# Altium PCB Positive_PCB.PcbDoc
Units mm, origin at the board's own origin, x right, y up, seen from the top; angles counter-clockwise.
Board outline 260 x 33 mm, 4 copper layers (Top Layer 1, Top Layer 2, Bottom Layer 2, Bottom Layer 1), stack 0.603 mm thick; 32 components, 34 nets, 85 pads, 24 vias.
Unrouted connection lines stored in the file: 5.
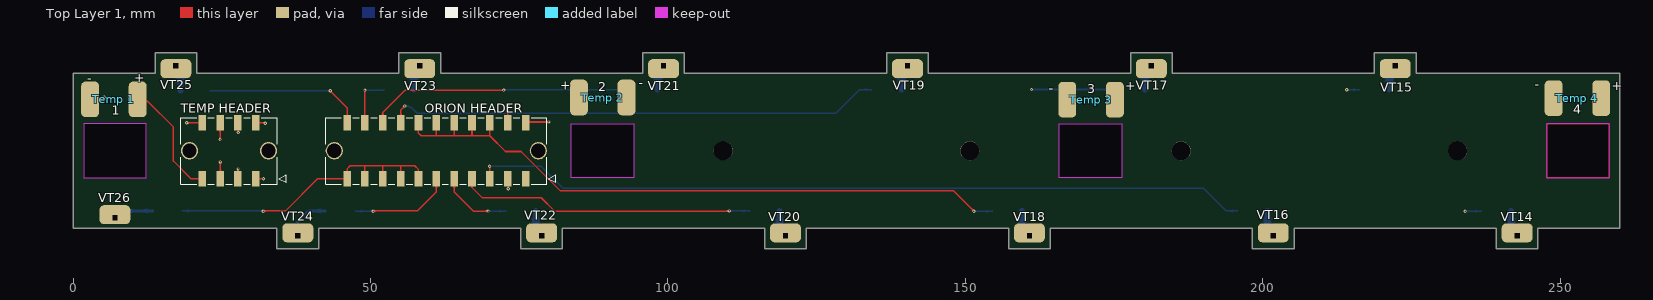
[diagram p0: Top Layer 1 view]
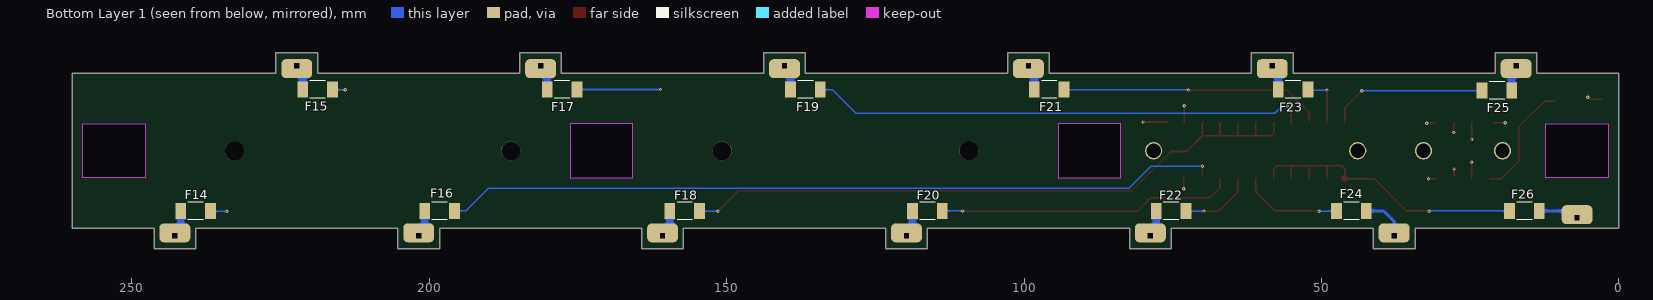
[diagram p1: Bottom Layer 1 view, seen from below]
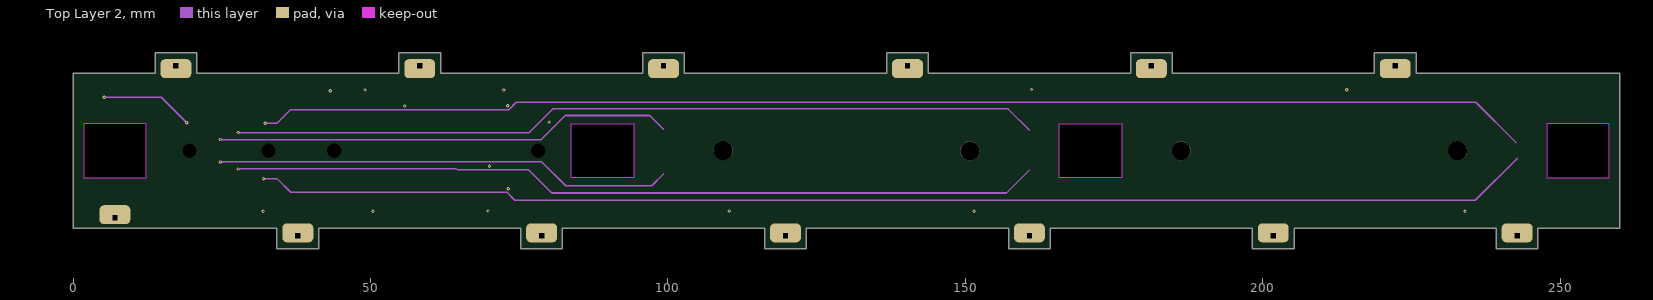
[diagram p2: Top Layer 2]
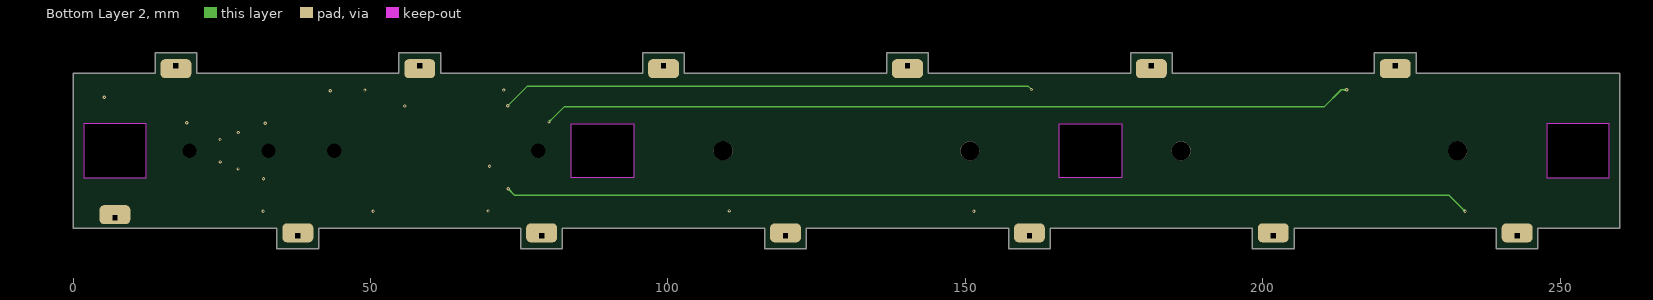
[diagram p3: Bottom Layer 2]
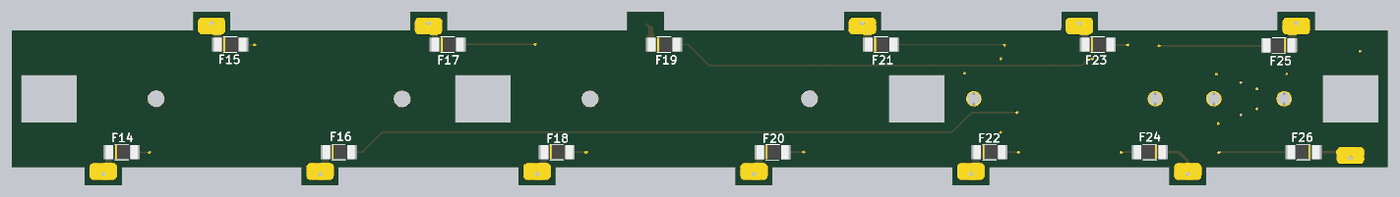
[diagram p4: 3D render of the assembled board from below, using the file's embedded part models]

## Layer stack, top to bottom
Top Solder: solder mask 0.0102, Solder Resist, Dk 3.5
Top Layer 1: signal copper 0.035
Dielectric 2: prepreg 0.0711, PP-006, Dk 4.1
Top Layer 2: signal copper 0.0356
Dielectric 1: dielectric 0.32, FR-4, Dk 4.8
Bottom Layer 2: signal copper 0.0356
Dielectric 3: prepreg 0.0711, PP-006, Dk 4.1
Bottom Layer 1: signal copper 0.035
Bottom Solder: solder mask 0.0102, Solder Resist, Dk 3.5

## Board outline
34.263,9.893 34.263,13.393 0.013,13.393 0.013,39.393 13.763,39.393 13.763,42.893 20.763,42.893 20.763,39.393 54.763,39.393 54.763,42.893 61.763,42.893 61.763,39.393 95.763,39.393 95.763,42.893 102.763,42.893 102.763,39.393 136.763,39.393 136.763,42.893 143.763,42.893 143.763,39.393 177.763,39.393 177.763,42.893 184.763,42.893 184.763,39.393 218.763,39.393 218.763,42.893 225.763,42.893 225.763,39.393 260.013,39.393 260.013,13.393 246.263,13.393 246.263,9.893 239.263,9.893 239.263,13.393 205.263,13.393 205.263,9.893 198.263,9.893 198.263,13.393 164.263,13.393 164.263,9.893 157.263,9.893 157.263,13.393 123.263,13.393 123.263,9.893 116.263,9.893 116.263,13.393 82.263,13.393 82.263,9.893 75.263,9.893 75.263,13.393 41.263,13.393 41.263,9.893
cut-out: 83.763,30.893 94.263,30.893 94.263,21.893 83.763,21.893
cut-out: 1.763,30.893 1.763,21.893 12.263,21.893 12.263,30.893
cut-out: 165.763,30.893 176.263,30.893 176.263,21.893 165.763,21.893
cut-out: 247.763,30.893 247.763,21.893 258.263,21.893 258.263,30.893

## Design rules (kind name [scope] priority, off if disabled: settings)
Clearance [All] p1: gap=0.2 ignorepadtopadclearanceinfootprint=FALSE
PolygonConnect [All] p1: connectstyle=Relief reliefconductorwidth=0.254 reliefentries=4 polygonreliefangle="90 Angle" airgapwidth=0.254
RoutingVias [All] p1: holewidth=0.711 width=1.27 viastyle="Through Hole" minholewidth=0.711 minwidth=1.27 maxholewidth=0.711 maxwidth=1.27
SolderMaskExpansion [All] p1: expansion=0.102 istentingtop=FALSE
Width [All] p1: maxlimit=2 minlimit=0.257 preferedwidth=0.257 minimp=50.000000 maximp=50.000000 favimp=50.000000
29 further rules are at their usual default settings.

## Components (designator, comment, footprint, x,y, rotation, side; value= is the part's Value field where it differs from the comment)
F14 "0154.750MRL" 0451Series_LTF 239.263,16.27 r180 bottom
F15 "0154.750MRL" 0451Series_LTF 218.763,36.67 r180 bottom
F16 "0154.750MRL" 0451Series_LTF 198.263,16.27 r180 bottom
F17 "0154.750MRL" 0451Series_LTF 177.668,36.67 r180 bottom
F18 "0154.750MRL" 0451Series_LTF 157.042,16.27 r180 bottom
F19 "0154.750MRL" 0451Series_LTF 136.763,36.67 r180 bottom
F20 "0154.750MRL" 0451Series_LTF 116.25,16.25 r180 bottom
F21 "0154.750MRL" 0451Series_LTF 95.763,36.67 r180 bottom
F22 "0154.750MRL" 0451Series_LTF 75.263,16.27 r180 bottom
F23 "0154.750MRL" 0451Series_LTF 54.763,36.67 r180 bottom
F24 "0154.750MRL" 0451Series_LTF 44.95,16.27 r0 bottom
F25 "0154.750MRL" 0451Series_LTF 20.51,36.5 r0 bottom
F26 "0154.750MRL" 0451Series_LTF 15.878,16.27 r0 bottom
"ORION HEADER" "430452215" CON_430452215_MOL 61.052,26.393 r0 top
"Temp 1" "Temp_Pins" TEMP_PINS 6.84,35.04 r180 top
"Temp 2" "Temp_Pins" TEMP_PINS 89.02,35.34 r0 top
"Temp 3" "Temp_Pins" TEMP_PINS 171.13,34.98 r180 top
"Temp 4" "Temp_Pins" TEMP_PINS 252.89,35.23 r180 top
"TEMP HEADER" "430450815" CON_430450815_MOL 26.2,26.393 r0 top
VT14 "Voltage_Tap" VOLTAGE_TAP#1 242.76,12.09 r180 top
VT15 "Voltage_Tap" VOLTAGE_TAP#2 222.263,40.693 r90 top
VT16 "Voltage_Tap" VOLTAGE_TAP#3 209.403,8.687 r90 top
VT17 "Voltage_Tap" VOLTAGE_TAP#4 178.145,38.387 r90 top
VT18 "Voltage_Tap" VOLTAGE_TAP#5 177.213,13.583 r90 top
VT19 "Voltage_Tap" VOLTAGE_TAP#6 152.921,50.388 r180 top
VT20 "Voltage_Tap" VOLTAGE_TAP#7 128.083,16.833 r90 top
VT21 "Voltage_Tap" VOLTAGE_TAP#8 94.635,32.647 r90 top
VT22 "Voltage_Tap" VOLTAGE_TAP#9 84.483,20.749 r90 top
VT23 "Voltage_Tap" VOLTAGE_TAP#10 57.845,31.917 r90 top
VT24 "Voltage_Tap" VOLTAGE_TAP#11 29.303,13.643 r90 top
VT25 "Voltage_Tap" VOLTAGE_TAP#12 20.888,37.037 r90 top
VT26 "Voltage_Tap" VOLTAGE_TAP#13 11.225,13.073 r180 top

## Footprints (in the part's own frame and the unit in brackets; to place one, negate y for a bottom-side part, rotate by r counter-clockwise, add the part's x,y. Pads: shape width x height; smd on the part's side, far side on the other; paste and mask are expansions set on the pad)
0451Series_LTF [mil]
  rect 71x106 smd paste+0 mask+0: 1(-98.5,0) 2(98.5,0)
  silkscreen extent -51,-58 51,58, body extent -120,-53 120,53, height 106
CON_430450815_MOL [mm]
  rect 1.27x2.54 smd paste+0 mask+0.076: 1(4.5,-4.7) 2(1.5,-4.7) 3(-1.5,-4.7) 4(-4.5,-4.7) 5(4.5,4.7) 6(1.5,4.7) 7(-1.5,4.7) 8(-4.5,4.7)
  round 2.91 / inner round 1.524 / far side round 2.91 hole 2.41 paste-1.455 mask+0.076: P1(6.65,0) P2(-6.65,0)
  silkscreen extent -8.07,-5.61 9.6,5.59, body extent -8.08,-5.61 8.08,5.59, height 9.95
CON_430452215_MOL [mm]
  rect 1.27x2.54 smd paste+0 mask+0.076: 1(15,-4.7) 2(12,-4.7) 3(9,-4.7) 4(6,-4.7) 5(3,-4.7) 6(0,-4.7) 7(-3,-4.7) 8(-6,-4.7) 9(-9,-4.7) 10(-12,-4.7) 11(-15,-4.7) 12(15,4.7) 13(12,4.7) 14(9,4.7) 15(6,4.7) 16(3,4.7) 17(0,4.7) 18(-3,4.7) 19(-6,4.7) 20(-9,4.7) 21(-12,4.7) 22(-15,4.7)
  round 2.91 / inner round 1.524 / far side round 2.91 hole 2.41 paste-1.455 mask+0.076: P1(17.15,0) P2(-17.15,0)
  silkscreen extent -18.57,-5.61 20.1,5.59, body extent -18.57,-5.61 18.57,5.59, height 9.95
TEMP_PINS [mm]
  rrect50% 3x6 smd: 1+(-4,0) 1-(4,0)
VOLTAGE_TAP#1 [mm]
  rrect50% 5.2x3.2 hole 0.8 square copper offset 0,-0.5: 1(0,0)
VOLTAGE_TAP#2 [mm]
  rrect50% 3.2x5.2 hole 0.8 square copper offset -0.5,0: 1(0,0)
VOLTAGE_TAP#3 [mm]
  rrect50% 3.2x5.2 hole 0.8 square copper offset 0.5,0: 1(3.403,7.643)
VOLTAGE_TAP#4 [mm]
  rrect50% 3.2x5.2 hole 0.8 square copper offset -0.5,0: 1(2.303,-3.115)
VOLTAGE_TAP#5 [mm]
  rrect50% 3.2x5.2 hole 0.8 square copper offset 0.5,0: 1(-1.493,16.453)
VOLTAGE_TAP#6 [mm]
  rrect50% 5.2x3.2 hole 0.8 square copper offset 0,0.5: 1(12.661,9.698)
VOLTAGE_TAP#7 [mm]
  rrect50% 3.2x5.2 hole 0.8 square copper offset 0.5,0: 1(-4.743,8.323)
VOLTAGE_TAP#8 [mm]
  rrect50% 3.2x5.2 hole 0.8 square copper offset -0.5,0: 1(8.043,-4.625)
VOLTAGE_TAP#9 [mm]
  rrect50% 3.2x5.2 hole 0.8 square copper offset 0.5,0: 1(-8.659,5.723)
VOLTAGE_TAP#10 [mm]
  rrect50% 3.2x5.2 hole 0.8 square copper offset -0.5,0: 1(8.773,-0.415)
VOLTAGE_TAP#11 [mm]
  rrect50% 3.2x5.2 hole 0.8 square copper offset 0.5,0: 1(-1.553,-8.467)
VOLTAGE_TAP#12 [mm]
  rrect50% 3.2x5.2 hole 0.8 square copper offset -0.5,0: 1(3.653,3.625)
VOLTAGE_TAP#13 [mm]
  rrect50% 5.2x3.2 hole 0.8 square copper offset 0,-0.5: 1(4.215,-2.067)

## Part data
F14 F15 F16 F17 F18 F19 F20 F21 F22 F23 F24 F25 F26: "FUSE BOARD MNT 750MA 125VAC/VDC", Digikey Part Number=F2576CT-ND, Manufacturer="Littelfuse Inc.", Digikey Link=https://www.digikey.com.au/en/products/detail/littelfuse-inc/0451-750MRL/700816, Part Number=0154.750MRL
"ORION HEADER" "TEMP HEADER": "No Description Available", Mfr_Name="Molex Connector Corporation", RefDes=RefDes, Type=Type
VT14 VT15 VT16 VT17 VT18 VT19 VT20 VT21 VT22 VT23 VT24 VT25 VT26: library part "Voltage Tap", Angle=0, Contact=NA, Flange=No, Part Number="Voltage Tap", Pitch=0mm, Positions=1, Row Spacing=0mm

## Free pads (board coordinates)
  round 3.2 hole 3.2: "Mounting Hole"(109.263,26.393) "Mounting Hole"(150.763,26.363) "Mounting Hole"(186.263,26.363) "Mounting Hole"(232.763,26.393)

## Via types
v1: diameter 0.55, hole 0.25, Top Layer 1 to Bottom Layer 1, 24 vias

## Nets (pads, with @x,y where several pads share a name; then routed paths per layer and width w, separated by ;. In a path a pad name is that pad's centre, name@x,y a point inside that pad or via, vN(x,y) a via of type N, cw(c..) or ccw(c..) an arc to the next point about the centre after c; other vN are vias at no path point)
1+: "Temp 1.1+" "TEMP HEADER.4" | length 19.7
  Top Layer 1 w0.257: 10.78,34.91 10.975,34.715 12.515,34.715 16.855,30.375 16.855,24.655 19.817,21.693 21.7,21.693
1-: "Temp 1.1-" "TEMP HEADER.8" | length 20.1
  Top Layer 1 w0.257: 2.84,35.04 4.781,35.04 5.141,35.4 v1(5.22,35.4) ; v1(19.08,31.12) 21.02,31.12 21.04,31.1
  Top Layer 2 w0.257: v1(5.22,35.4) 14.8,35.4 v1(19.08,31.12)
2+: "Temp 2.1+" "TEMP HEADER.7" | length 80
  Top Layer 1 w0.257: v1(24.69,28.28) 24.69,31.09 24.7,31.1
  Top Layer 2 w0.257: v1(24.69,28.28) 78.69,28.28 82.73,32.32 96.94,32.32 99.263,29.997
2-: "Temp 2.1-" "TEMP HEADER.3" | length 79.8
  Top Layer 1 w0.257: 24.74,21.708 v1(24.74,24.51)
  Top Layer 2 w0.257: v1(24.74,24.51) 78.79,24.51 82.8,20.5 97.28,20.5 99.263,22.483
3+: "Temp 3.1+" "TEMP HEADER.6" | length 137.8
  Top Layer 1 w0.257: 27.7,31.1 27.74,31.06 v1(27.74,29.46)
  Top Layer 2 w0.257: v1(27.74,29.46) 76.67,29.46 80.635,33.425 157.165,33.425 160.763,29.827
3-: "Temp 3.1-" "TEMP HEADER.2" | length 137.5
  Top Layer 1 w0.257: 27.565,22.2 27.71,22.345 v1(27.71,23.34)
  Top Layer 2 w0.257: v1(27.71,23.34) 64.424,23.34 64.601,23.163 76.578,23.163 80.448,19.292 156.902,19.292 160.763,23.153
4+: "Temp 4.1+" "TEMP HEADER.5" | length 216.2
  Top Layer 1 w0.257: 30.7,31.093 32.247,31.093 v1(32.3,31.04)
  Top Layer 2 w0.257: v1(32.3,31.04) 32.344,30.996 34.236,30.996 36.5,33.26 73.213,33.26 74.483,34.53 235.79,34.53 242.55,27.77
4-: "Temp 4.1-"
14: "ORION HEADER.2" F14.2 | length 167.3
  Top Layer 1 w0.257: 73.04,22.05 73.15,21.94 v1(73.15,19.99)
  Bottom Layer 2 w0.257: v1(73.15,19.99) 74.25,18.89 231.33,18.89 v1(234.01,16.21)
  Bottom Layer 1 w0.257: v1(234.01,16.21) 236.701,16.21 F14.2
15: "ORION HEADER.12" F15.2 | length 142.7
  Top Layer 1 w0.257: 75.881,31.171 75.94,31.23 v1(79.98,31.23)
  Bottom Layer 2 w0.257: v1(79.98,31.23) 82.519,33.769 210.309,33.769 213.18,36.64 v1(214.1,36.64)
  Bottom Layer 1 w0.257: v1(214.1,36.64) 216.231,36.64 F15.2
16: "ORION HEADER.3" F16.2 | length 130.2
  Top Layer 1 w0.257: 70.01,22.403 v1(70.01,23.77)
  Bottom Layer 1 w0.257: v1(70.01,23.77) 78.67,23.77 82.343,20.097 190.023,20.097 ; 190.023,20.087 193.84,16.27 F16.2
17: "ORION HEADER.13" F17.2 | length 106.5
  Top Layer 1 w0.257: 73.052,31.11 73.08,31.138 v1(73.08,33.98)
  Bottom Layer 2 w0.257: v1(73.08,33.98) 76.3,37.2 160.6,37.2 v1(161.11,36.69)
  Bottom Layer 1 w0.257: v1(161.11,36.69) 175.146,36.69 F17.2
18: "ORION HEADER.14" "ORION HEADER.15" "ORION HEADER.16" "ORION HEADER.17" "ORION HEADER.18" F18.2 | length 112.7
  Top Layer 1 w0.257: 57.82,31.11 58.052,31.11 ; 58.052,31.093 58.052,29.348 58.502,28.898 61.112,28.898 ; 61.052,31.093 61.052,28.958 61.112,28.898 ; 64.052,31.093 64.095,31.05 64.095,28.935 ; 67.05,28.935 67.05,31.091 67.052,31.093 ; 69.82,31.11 69.822,31.108 ; 70.052,31.11 70.052,31.093 70.052,28.898 ; v1(151.43,16.23) 147.965,19.695 81.865,19.695 75.29,26.27 72.68,26.27 70.052,28.898 ; 61.112,28.898 64.095,28.898 67.05,28.898 70.052,28.898
  Bottom Layer 1 w0.257: v1(151.43,16.23) 154.5,16.23 F18.2
19: "ORION HEADER.19" F19.2 | length 84
  Top Layer 1 w0.257: 55.102,30.912 55.102,33.295 55.179,33.372 v1(55.749,33.918)
  Bottom Layer 1 w0.257: v1(55.749,33.918) 56.343,33.918 56.538,33.723 56.807,33.723 57.842,32.688 128.238,32.688 132.22,36.67 F19.2
20: "ORION HEADER.4" F20.2 | length 49.9
  Top Layer 1 w0.257: 67.052,21.71 67.058,21.704 67.058,20.205 68.793,18.47 ; 68.793,18.487 78.673,18.487 80.91,16.25 v1@110.338,16.25
  Bottom Layer 1 w0.257: v1(110.32,16.28) 113.718,16.28 F20.2
21: "ORION HEADER.20" F21.2 | length 44.3
  Top Layer 1 w0.257: 52.042,31.332 52.042,32.822 54.544,35.324 55.81,36.59 v1(72.37,36.59)
  Bottom Layer 1 w0.257: v1(72.37,36.59) 72.449,36.59 72.529,36.67 F21.2
22: "ORION HEADER.5" F22.2 | length 12.3
  Top Layer 1 w0.257: 64.052,21.71 64.052,19.468 67.265,16.255 69.744,16.255 v1(69.746,16.254)
  Bottom Layer 1 w0.257: v1(69.746,16.254) 72.745,16.254 F22.2
23: "ORION HEADER.21" F23.2 | length 8.7
  Top Layer 1 w0.257: v1(49.05,36.6) 49.05,31.15 49.06,31.14
  Bottom Layer 1 w0.257: v1(49.05,36.6) 52.191,36.6 F23.2
24: "ORION HEADER.6" F24.2 | length 17.2
  Top Layer 1 w0.257: v1(50.416,16.244) 50.441,16.27 57.86,16.27 61.052,19.462 61.052,21.71
  Bottom Layer 1 w0.257: F24.2 47.478,16.244 v1(50.416,16.244)
25: "ORION HEADER.22" F25.2 | length 26.8
  Top Layer 1 w0.257: v1(43.23,36.46) 46.09,33.6 46.09,31.148 46.052,31.11
  Bottom Layer 1 w0.257: F25.2 23.052,36.46 v1(43.23,36.46)
26: "ORION HEADER.7" "ORION HEADER.8" "ORION HEADER.9" "ORION HEADER.10" "ORION HEADER.11" F26.2 | length 52.4
  Top Layer 1 w0.257: v1(31.93,16.23) 31.97,16.27 35.69,16.27 41.13,21.71 46.052,21.71 ; 46.052,21.693 46.052,21.71 ; 49.052,21.693 49.004,21.741 49.004,23.88 ; 52.052,21.693 52.052,23.88 ; 55.052,21.693 55.052,23.84 55.012,23.88 ; 58.052,21.693 58.052,23.238 57.41,23.88 55.012,23.88 ; 46.052,21.71 46.052,23.342 46.59,23.88 49.004,23.88 ; 49.004,23.88 52.052,23.88 ; 52.052,23.88 55.012,23.88
  Top Layer 1 w1: 46.052,21.693 46.187,21.828
  Bottom Layer 1 w0.257: F26.2 v1@31.93,16.27
NetF14_1: F14.1 VT14.1 | length 4.6
  Bottom Layer 1 w0.257: VT14.1@241.765,13.085 VT14.1
  Bottom Layer 1 w1: VT14.1@241.765,13.085 F14.1
NetF15_1: F15.1 VT15.1 | length 4.4
  Bottom Layer 1 w0.257: VT15.1@221.265,39.695 VT15.1
  Bottom Layer 1 w1: F15.1 VT15.1@221.265,39.695
NetF16_1: F16.1 VT16.1 | length 4.6
  Bottom Layer 1 w0.257: VT16.1@200.765,13.085 VT16.1
  Bottom Layer 1 w1: VT16.1@200.765,13.085 F16.1
NetF17_1: F17.1 VT17.1 | length 4.5
  Bottom Layer 1 w0.257: VT17.1@180.17,39.6 VT17.1
  Bottom Layer 1 w1: F17.1 VT17.1@180.17,39.6
NetF18_1: F18.1 VT18.1 | length 5.6
  Top Layer 1 w0.257: VT18.1@160.12,12.73 VT18.1
  Bottom Layer 1 w0.257: VT18.1@159.544,13.306 VT18.1
  Bottom Layer 1 w1: VT18.1@159.544,13.306 F18.1
NetF19_1: F19.1 VT19.1 | length 4.4
  Bottom Layer 1 w0.257: VT19.1@139.265,39.695 VT19.1
  Bottom Layer 1 w1: F19.1 VT19.1@139.265,39.695
NetF20_1: F20.1 VT20.1 | length 4.6
  Bottom Layer 1 w0.257: VT20.1@118.752,13.098 VT20.1
  Bottom Layer 1 w1: VT20.1@118.752,13.098 F20.1
NetF21_1: F21.1 VT21.1 | length 4.4
  Bottom Layer 1 w0.257: VT21.1@98.265,39.695 VT21.1
  Bottom Layer 1 w1: F21.1 VT21.1@98.265,39.695
NetF22_1: F22.1 VT22.1 | length 4.6
  Bottom Layer 1 w0.257: VT22.1@77.765,13.085 VT22.1
  Bottom Layer 1 w1: VT22.1@77.765,13.085 F22.1
NetF23_1: F23.1 VT23.1 | length 4.4
  Bottom Layer 1 w0.257: VT23.1@57.265,39.695 VT23.1
  Bottom Layer 1 w1: F23.1 VT23.1@57.265,39.695
NetF24_1: F24.1 VT24.1 | length 7.8
  Bottom Layer 1 w0.5: VT24.1 37.77,14.51 39.53,16.27 F24.1
NetF25_1: F25.1 VT25.1 | length 4.3
  Bottom Layer 1 w0.257: VT25.1@17.27,40.65 VT25.1@18.016,39.905
  Bottom Layer 1 w1: F25.1 VT25.1@18.008,39.795
NetF26_1: F26.1 VT26.1 | length 6.8
  Bottom Layer 1 w0.5: VT26.1 8.14,16.27 F26.1
pads on no net: "ORION HEADER.1" "ORION HEADER.P1" "ORION HEADER.P2" "TEMP HEADER.1" "TEMP HEADER.P1" "TEMP HEADER.P2"
copper on no net: | length 216.5
  Top Layer 1 w0.257: 30.7,21.7 30.71,21.71 v1(31.99,21.71)
  Top Layer 2 w0.257: v1(31.99,21.71) 34.275,21.71 36.578,19.407 72.912,19.407 74.235,18.085 235.735,18.085 242.763,25.113

## Polygon pours and split planes (outlines as drawn)
no net on Top Layer 1 "NONET_L01_P003" (solid, pour order 3): 247.763,30.893 258.263,30.893 258.263,21.893 247.763,21.893

## Silkscreen, mask and mechanical layers (free items; w line width, h text height)
Top Overlay:
  text "+" at 10.284,37.91 h1.52
  text "-" at 2.394,37.862 h1.52
  text "-" at 95.064,37.112 h1.52
  text "-" at 245.684,36.852 h1.52
  text "+" at 81.897,36.67 h1.52
  text "+" at 176.884,36.591 h1.52
  text "+" at 258.644,36.6 h1.52
  text "2" at 88.244,36.404 h1.52
  text "-" at 163.996,36.182 h1.52
  text "3" at 170.504,36.044 h1.52
  text "4" at 252.214,32.594 h1.52
  text "1" at 6.484,32.484 h1.52
Mechanical 1:
  lines w0.254: 12.263,21.893 12.263,30.893 ; 20.763,39.393 54.763,39.393 ; 83.763,21.893 83.763,30.893
  lines w0.257: 0.013,13.393 0.013,39.393 13.763,39.393 13.763,42.893 20.763,42.893 20.763,39.393 ; 0.013,13.397 34.263,13.397 ; 8.513,14.893 5.513,14.893 5.513,15.393 8.513,15.393 ; 12.263,21.893 1.763,21.893 1.763,30.893 12.263,30.893 ; 34.263,13.393 34.263,9.893 41.263,9.893 41.263,13.393 75.263,13.393 75.263,9.893 82.263,9.893 82.263,13.393 116.263,13.393 116.263,9.893 123.263,9.893 123.263,13.393 157.263,13.393 157.263,9.893 164.263,9.893 164.263,13.393 198.263,13.393 198.263,9.893 205.263,9.893 205.263,13.393 239.263,13.393 239.263,9.893 246.263,9.893 246.263,13.393 260.013,13.393 260.013,39.393 225.763,39.393 225.763,42.893 218.763,42.893 218.763,39.393 184.763,39.393 184.763,42.893 177.763,42.893 177.763,39.393 143.763,39.393 143.763,42.893 136.763,42.893 136.763,39.393 102.763,39.393 102.763,42.893 95.763,42.893 95.763,39.393 61.763,39.393 61.763,42.893 54.763,42.893 54.763,39.393 ; 83.763,21.893 94.263,21.893 ; 83.763,30.893 94.263,30.893 94.263,22.13 ; 15.77,40.24 15.77,41.103 18.77,41.103 18.77,40.24 15.77,40.24 ; 36.263,11.793 39.263,11.793 39.263,12.393 36.263,12.393 36.263,11.793 ; 56.763,40.393 59.763,40.393 59.763,40.993 56.763,40.993 56.763,40.393 ; 77.263,11.793 80.263,11.793 80.263,12.393 77.263,12.393 77.263,11.793 ; 97.763,40.393 97.763,40.993 100.763,40.993 100.763,40.393 97.763,40.393 ; 118.263,11.793 121.263,11.793 121.263,12.393 118.263,12.393 118.263,11.793 ; 138.763,40.393 138.763,40.993 141.763,40.993 141.763,40.393 138.763,40.393 ; 159.263,11.793 162.263,11.793 162.263,12.393 159.263,12.393 159.263,11.793 ; 165.763,21.893 176.263,21.893 176.263,30.893 165.763,30.893 165.763,21.893 ; 179.763,40.393 182.763,40.393 182.763,40.993 179.763,40.993 179.763,40.393 ; 200.263,11.793 200.263,12.393 203.263,12.393 203.263,11.793 200.263,11.793 ; 220.763,40.393 223.763,40.393 223.763,40.993 220.763,40.993 220.763,40.393 ; 241.263,11.793 244.263,11.793 244.263,12.393 241.263,12.393 241.263,11.793 ; 247.763,21.893 258.263,21.893 258.263,30.893 247.763,30.893 247.763,21.893